# EAGLE board wifi-board (EAGLE 7.1.0)
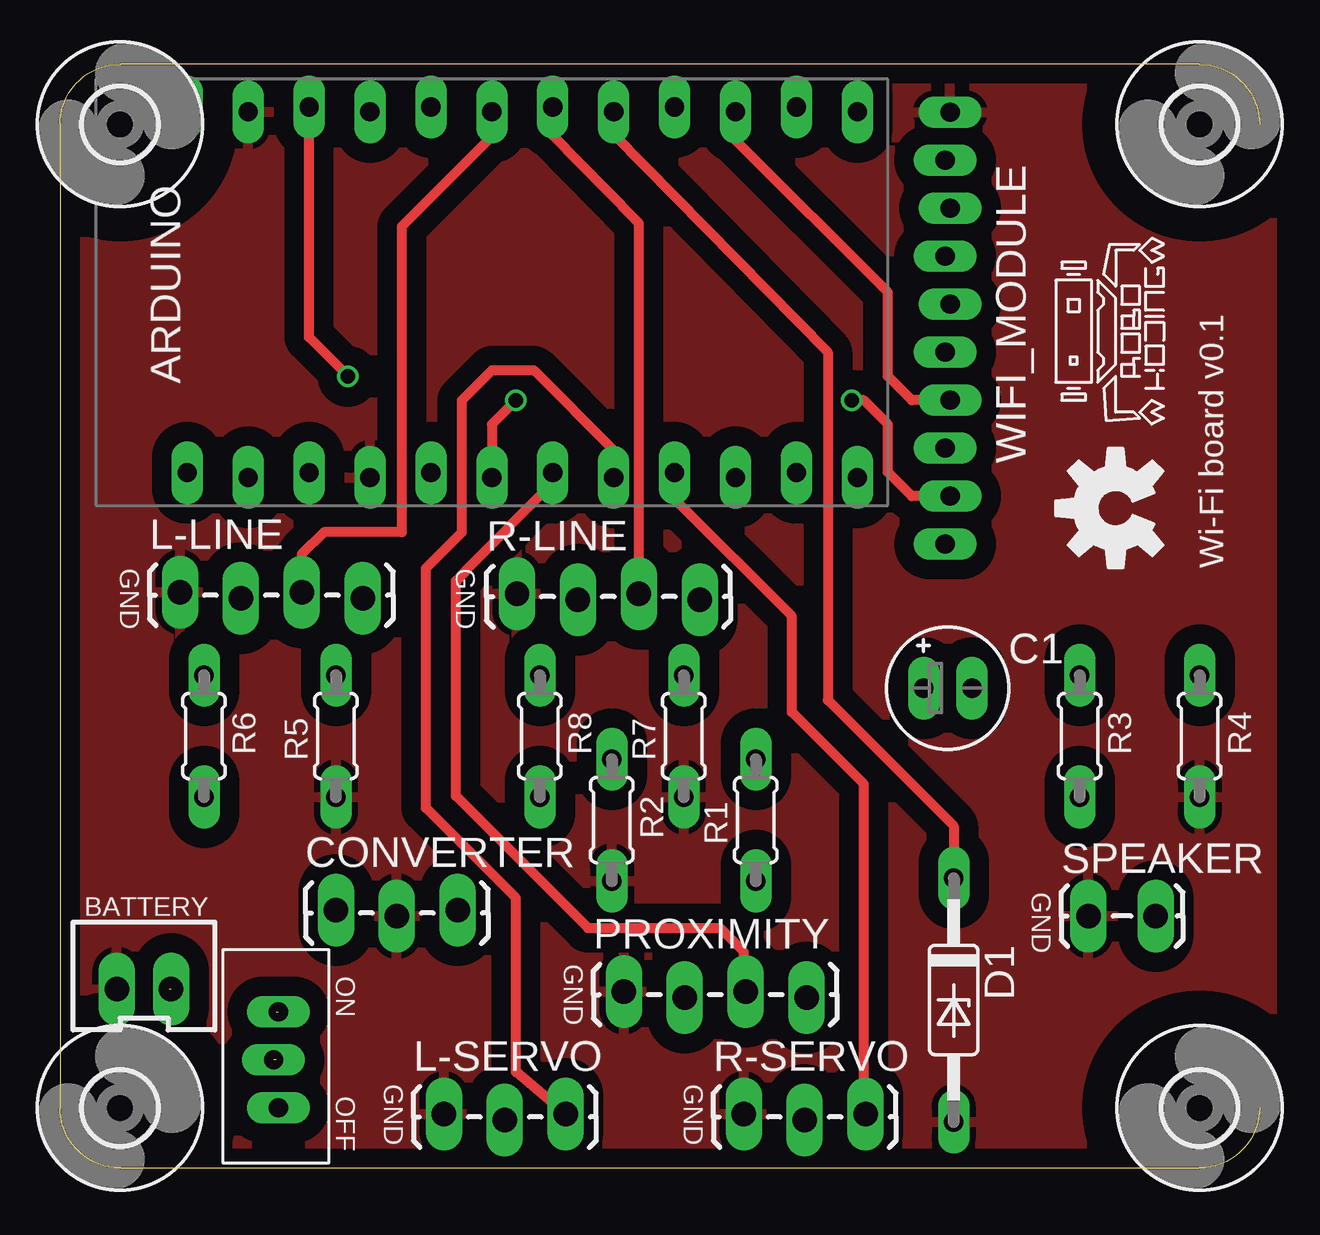
[diagram p0: board, top side]
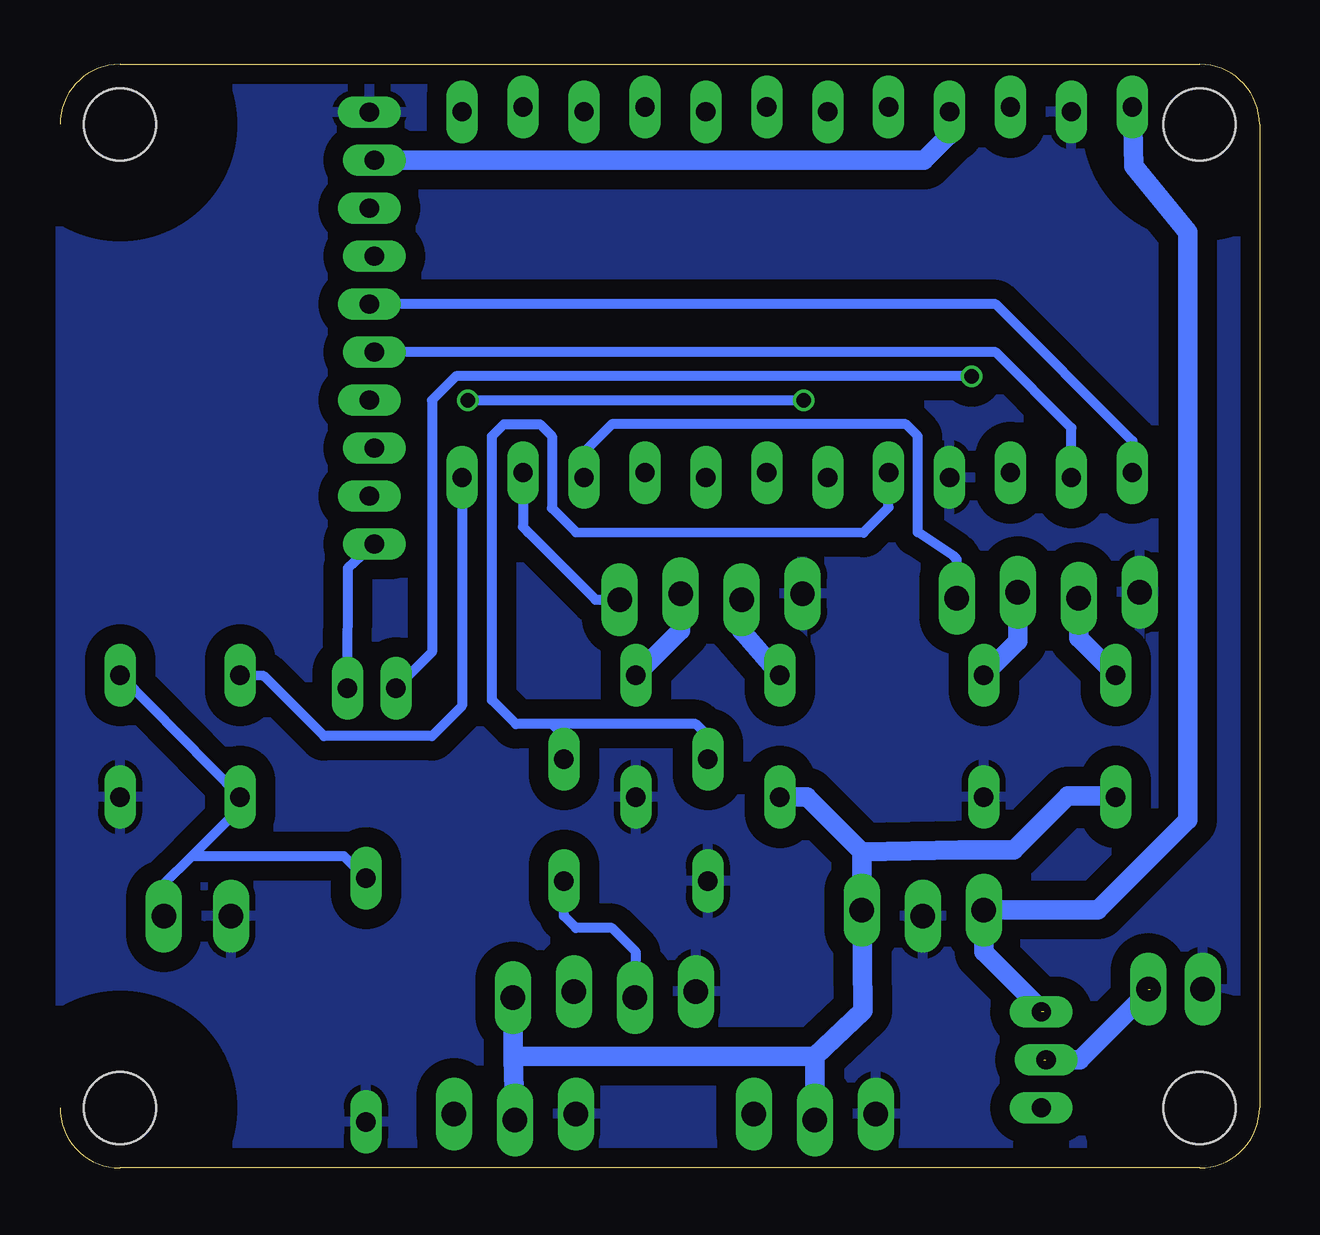
[diagram p1: board, bottom side, seen from below]

Size 50 x 46 mm. Coordinates in mm from the lower left corner, seen from the top.
Outline: 50,2.5 arc-90 47.5,0 2.5,0 arc-90 0,2.5 0,43.5 arc-90 2.5,46 47.5,46 arc-90 50,43.5
Copper layers (1*16): Top 0.035mm / dielectric 1.5mm / Bottom 0.035mm
Design rules "SeeedStudio_2layer_DRU_no_angle_20140221": minimum track width 6mil, minimum drill 12mil, track to track 6mil, track to pad 6mil, pad to pad 6mil, via to via 6mil, smd to smd 0mil, copper to edge 10mil, drill to drill 10mil, minimum pad ring 10mil, minimum via ring 6mil, stop-mask expansion 2mil, vias tented up to drill 100mil, thermal gap 10mil

## Footprints (pad centres in the part's own frame; a part is rotated, then mirrored left to right if it is on the bottom)
ARDUINO_PRO_MINI = drill 0.8 long: 1 -7.52,12.7; 2 -7.72,10.16; 3 -7.52,7.62; 4 -7.72,5.08; 5 -7.52,2.54; 6 -7.72,0; 7 -7.52,-2.54; 8 -7.72,-5.08; 9 -7.52,-7.62; 10 -7.72,-10.16; 11 -7.52,-12.7; 12 -7.72,-15.24; 13 7.52,-15.24; 14 7.72,-12.7; 15 7.52,-10.16; 16 7.72,-7.62; 17 7.52,-5.08; 18 7.72,-2.54; 19 7.52,0; 20 7.72,2.54; 21 7.52,5.08; 22 7.72,7.62; 23 7.52,10.16; 24 7.72,12.7
JST-2-PTH-VERT = drill 1.016 long: 1 -1.127,-0.55; 2 1.127,-0.55
E2-5 = drill 0.813 pad 1.27 long: + -1,0; - 1.016,0
1X03_LOCK_LONGPADS = drill 1.016 long: 1 0,0; 2 2.54,-0.254; 3 5.08,0
DO35Z10 = drill 0.813 long: A 5.08,0; C -5.08,0
1X04_LOCK_LONGPADS = drill 1.016 long: 1 0,0; 2 2.54,-0.254; 3 5.08,0; 4 7.62,-0.254
SPDT_SLIDE_SWITCH = drill 0.8 long: COMMON 0,0.1; SW1 -2,-0.1; SW2 2,-0.1
0204/5 = drill 0.813 long: 1 -2.54,0; 2 2.54,0
1X02_LOCK_LONGPADS = drill 1.016 long: 1 -0.127,0; 2 2.667,0
3,0 = hole 3: 0,0
WIFI_MODULE-T = drill 0.8 long: +3V3 -6,-0.1; EXT_RESET -2,-0.1; GND -8,0.1; NRELOAD -4,0.1; PWM_1 10,-0.1; PWM_2 8,0.1; PWM_3 6,-0.1; PWR_SW 4,0.1; RX 0,0.1; TX 2,-0.1

## Placement (x,y rotation side)
ARDUINO  [ARDUINO_PRO_MINI]  18,36.5 90 top
BATTERY  [JST-2-PTH-VERT]  3.5,8 0 top
C1  2.2uF  [E2-5]  37,20 0 top
CONVERTER  [1X03_LOCK_LONGPADS]  11.5,10.75 0 top
D1  3V  [DO35Z10]  37.25,7 270 top
L-LINE  [1X04_LOCK_LONGPADS]  5,24 0 top
L-SERVO  [1X03_LOCK_LONGPADS]  16,2.25 0 top
LOGO1  OSHW-LOGOM  [OSHW-LOGO-M]  44,27.5 90 top
LOGO2  ROBOKODING-LOGOM  [ROBOKODING-LOGO-M]  46,31 90 top
POWER  SPDT_SLIDE_SWITCH  [SPDT_SLIDE_SWITCH]  9,4.5 90 top
PROXIMITY  [1X04_LOCK_LONGPADS]  23.5,7.35 0 top
R1  1K8  [0204/5]  29,14.5 90 top
R2  3K3  [0204/5]  23,14.5 270 top
R3  100  [0204/5]  42.5,18 270 top
R4  1M  [0204/5]  47.5,18 270 top
R5  10K  [0204/5]  11.5,18 90 top
R6  220  [0204/5]  6,18 270 top
R7  10K  [0204/5]  26,18 90 top
R8  220  [0204/5]  20,18 270 top
R-LINE  [1X04_LOCK_LONGPADS]  19.05,23.94 0 top
R-SERVO  [1X03_LOCK_LONGPADS]  28.5,2.25 0 top
SPEAKER  [1X02_LOCK_LONGPADS]  43,10.5 0 top
U$1  [3,0]  47.5,2.5 0 top
U$2  [3,0]  47.5,43.5 0 top
U$3  [3,0]  2.5,2.5 0 top
U$4  [3,0]  2.5,43.5 0 top
WIFI_MODULE  [WIFI_MODULE-T]  37,36 270 top

## Library data of the parts
ARDUINO = SparkFun-Boards
BATTERY CONVERTER L-LINE L-SERVO PROXIMITY R-LINE R-SERVO SPEAKER = SparkFun-Connectors
C1 R1-R8 = Child-Friendly-Parts
D1 = diode
LOGO1 = SparkFun-Aesthetics
LOGO2 = Sumorobot
POWER = custom
U$1-U$4 = holes
WIFI_MODULE = usr_wifi

## Nets
+3V3: ARDUINO.21 WIFI_MODULE.+3V3
+5V: CONVERTER.3 L-SERVO.2 PROXIMITY.4 R6.2 R8.2 R-SERVO.2
A0: ARDUINO.17 D1.C R3.2 R4.1 SPEAKER.2
A1: ARDUINO.18 R7.2 R-LINE.3
A2: ARDUINO.19 L-LINE.3 R5.2
BAT_IN: BATTERY.2 POWER.COMMON
D2: ARDUINO.5 R1.2 R2.1
D3: ARDUINO.6 WIFI_MODULE.PWM_2
D4: ARDUINO.7 PROXIMITY.3
D5: ARDUINO.8 L-SERVO.3
D6: ARDUINO.9 R-SERVO.3
D7: ARDUINO.10 L-LINE.4
D8: ARDUINO.11 R-LINE.4
D9: ARDUINO.12 R3.1
D12: ARDUINO.15 WIFI_MODULE.PWR_SW
GND: ARDUINO.4 ARDUINO.23 BATTERY.1 CONVERTER.2 D1.A L-LINE.1 L-SERVO.1 PROXIMITY.1 R2.2 R4.2 R5.1 R7.1 R-LINE.1 R-SERVO.1 SPEAKER.1 WIFI_MODULE.GND
N$1: PROXIMITY.2 R1.1
N$6: L-LINE.2 R6.1
N$7: R8.1 R-LINE.2
NLINK: C1.- WIFI_MODULE.PWM_1
RST: ARDUINO.22 C1.+
RXD: ARDUINO.2 WIFI_MODULE.TX
TXD: ARDUINO.1 WIFI_MODULE.RX
VIN: ARDUINO.24 CONVERTER.1 POWER.SW2

## Tracks (layer width: path | path; a pad name or v marks a point on that pad's centre or on a via)
+3V3
  Bottom 0.813: WIFI_MODULE.+3V3 14,42 13,43 ARDUINO.21
+5V
  Bottom 0.813: 31.12,4.65 31.12,4.58 R-SERVO.2 | 16.58,13.17 CONVERTER.3 16.54,6.54 18.54,4.65 | 16.58,13.17 12.5,13.25 10.25,13.25 8,15.5 6.04,15.5 R6.2 | 18.54,4.65 L-SERVO.2 | 16.58,13.17 18.87,15.46 R8.2 | PROXIMITY.4 31.12,4.65 | 31.12,4.65 18.54,4.65
A0
  Top 0.406: ARDUINO.17 23.08,43.08 32,34 32,19.5 37.25,14.25 D1.C
  Bottom 0.406: R4.1 R3.2 42.5,15 44.5,13 | SPEAKER.2 45.67,11.83 44.5,13 | 44.5,13 38.17,13 D1.C
A1
  Top 0.406: R-LINE.3 24.13,39.37 24,39.5 20.54,43.04 ARDUINO.18
  Bottom 0.813: R-LINE.3 24.13,22.4 R7.2
A2
  Top 0.406: ARDUINO.19 18,43 14.25,39.25 14.25,26.5 11,26.5 10.08,25.58 L-LINE.3
  Bottom 0.813: L-LINE.3 10.08,21.96 R5.2
BAT_IN  (2 unrouted)
  Bottom 0.813: 4.5,7.45 4.55,7.45 7.5,4.5 9,4.5
D2
  Bottom 0.406: R2.1 23,18 23.5,18.5 29.5,18.5 | 29.5,18.5 31,18.5 32,19.5 32,30.5 31.5,31 30,31 29.5,30.5 29.5,27.5 28.5,26.5 16.51,26.48 15.5,27.5 15.46,27.54 ARDUINO.5 | R1.2 29,18 29.5,18.5
D3  (via drill 0.6)
  Top 0.406: WIFI_MODULE.PWM_2 35.5,28 34.5,29 34.5,31 33.5,32 v33,32 | v19,32 18,31 ARDUINO.6
  Bottom 0.406: v33,32 v19,32
D4
  Top 0.406: PROXIMITY.3 28.5,9 27.5,10 22,10 16.5,15.5 16.51,24.47 17,25 20.54,28.54 ARDUINO.7
D5
  Top 0.406: L-SERVO.3 19,4 19,11.25 15.25,15 15.25,25 16.75,26.5 16.75,32 18,33.25 19.75,33.25 23.08,29.92 ARDUINO.8
D6
  Top 0.406: R-SERVO.3 33.5,2.25 33.5,16 30.5,19 30.5,23 25.62,27.88 ARDUINO.9
D7
  Bottom 0.406: L-LINE.4 12.62,25.37 12.75,25.5 14.25,26.5 14.25,30.5 14.75,31 27,31 28.16,29.84 ARDUINO.10
D8
  Bottom 0.406: ARDUINO.11 30.7,26.72 30.5,26.5 27.69,23.69 R-LINE.4
D9
  Bottom 0.406: ARDUINO.12 33.24,19.26 34.5,18 39,18 41.5,20.5 R3.1
D12
  Top 0.406: WIFI_MODULE.PWR_SW 35.5,32 34.5,33 34.5,36.5 28.16,42.84 ARDUINO.15
GND
  pour Top (isolate 0.813): -0.5,46.5 50.5,46.5 50.5,-0.5 -0.5,-0.5
  pour Bottom (isolate 0.813): 0,46 50,46 50,0 0,0
N$1
  Bottom 0.406: PROXIMITY.2 26,9 27,10 28.5,10 29,10.5 R1.1
N$6
  Bottom 0.813: L-LINE.2 7.54,22.08 R6.1
N$7
  Bottom 0.813: R-LINE.2 21.59,22.4 R8.1
NLINK
  Bottom 0.406: C1.- 38,25 WIFI_MODULE.PWM_1
RST  (via drill 0.6)
  Top 0.406: v12,33 10.38,34.62 ARDUINO.22
  Bottom 0.406: v12,33 33.5,33 34.5,32 34.5,21.5 C1.+
RXD
  Bottom 0.406: ARDUINO.2 7.84,30.84 11,34 WIFI_MODULE.TX
TXD
  Bottom 0.406: ARDUINO.1 5.3,30.3 11,36 WIFI_MODULE.RX
VIN  (1 unrouted)
  Bottom 0.813: ARDUINO.24 5.25,41.75 3,39 3,14.5 6.75,10.75 CONVERTER.1 11.5,9 9,6.5

## Text on the board
tPlace: GND | GND | Wi-Fi board v0.1 | GND | ON | GND | GND | GND | OFF